# Altium PCB VALVE_MODULE_20221227.PcbDoc (part 2 of 4)
Units mm, origin at the board's own origin, x right, y up, seen from the top; angles counter-clockwise.
Board outline 260.15 x 142.01 mm, 2 copper layers (Top Layer, Bottom Layer); 455 components, 212 nets, 1302 pads, 385 vias.
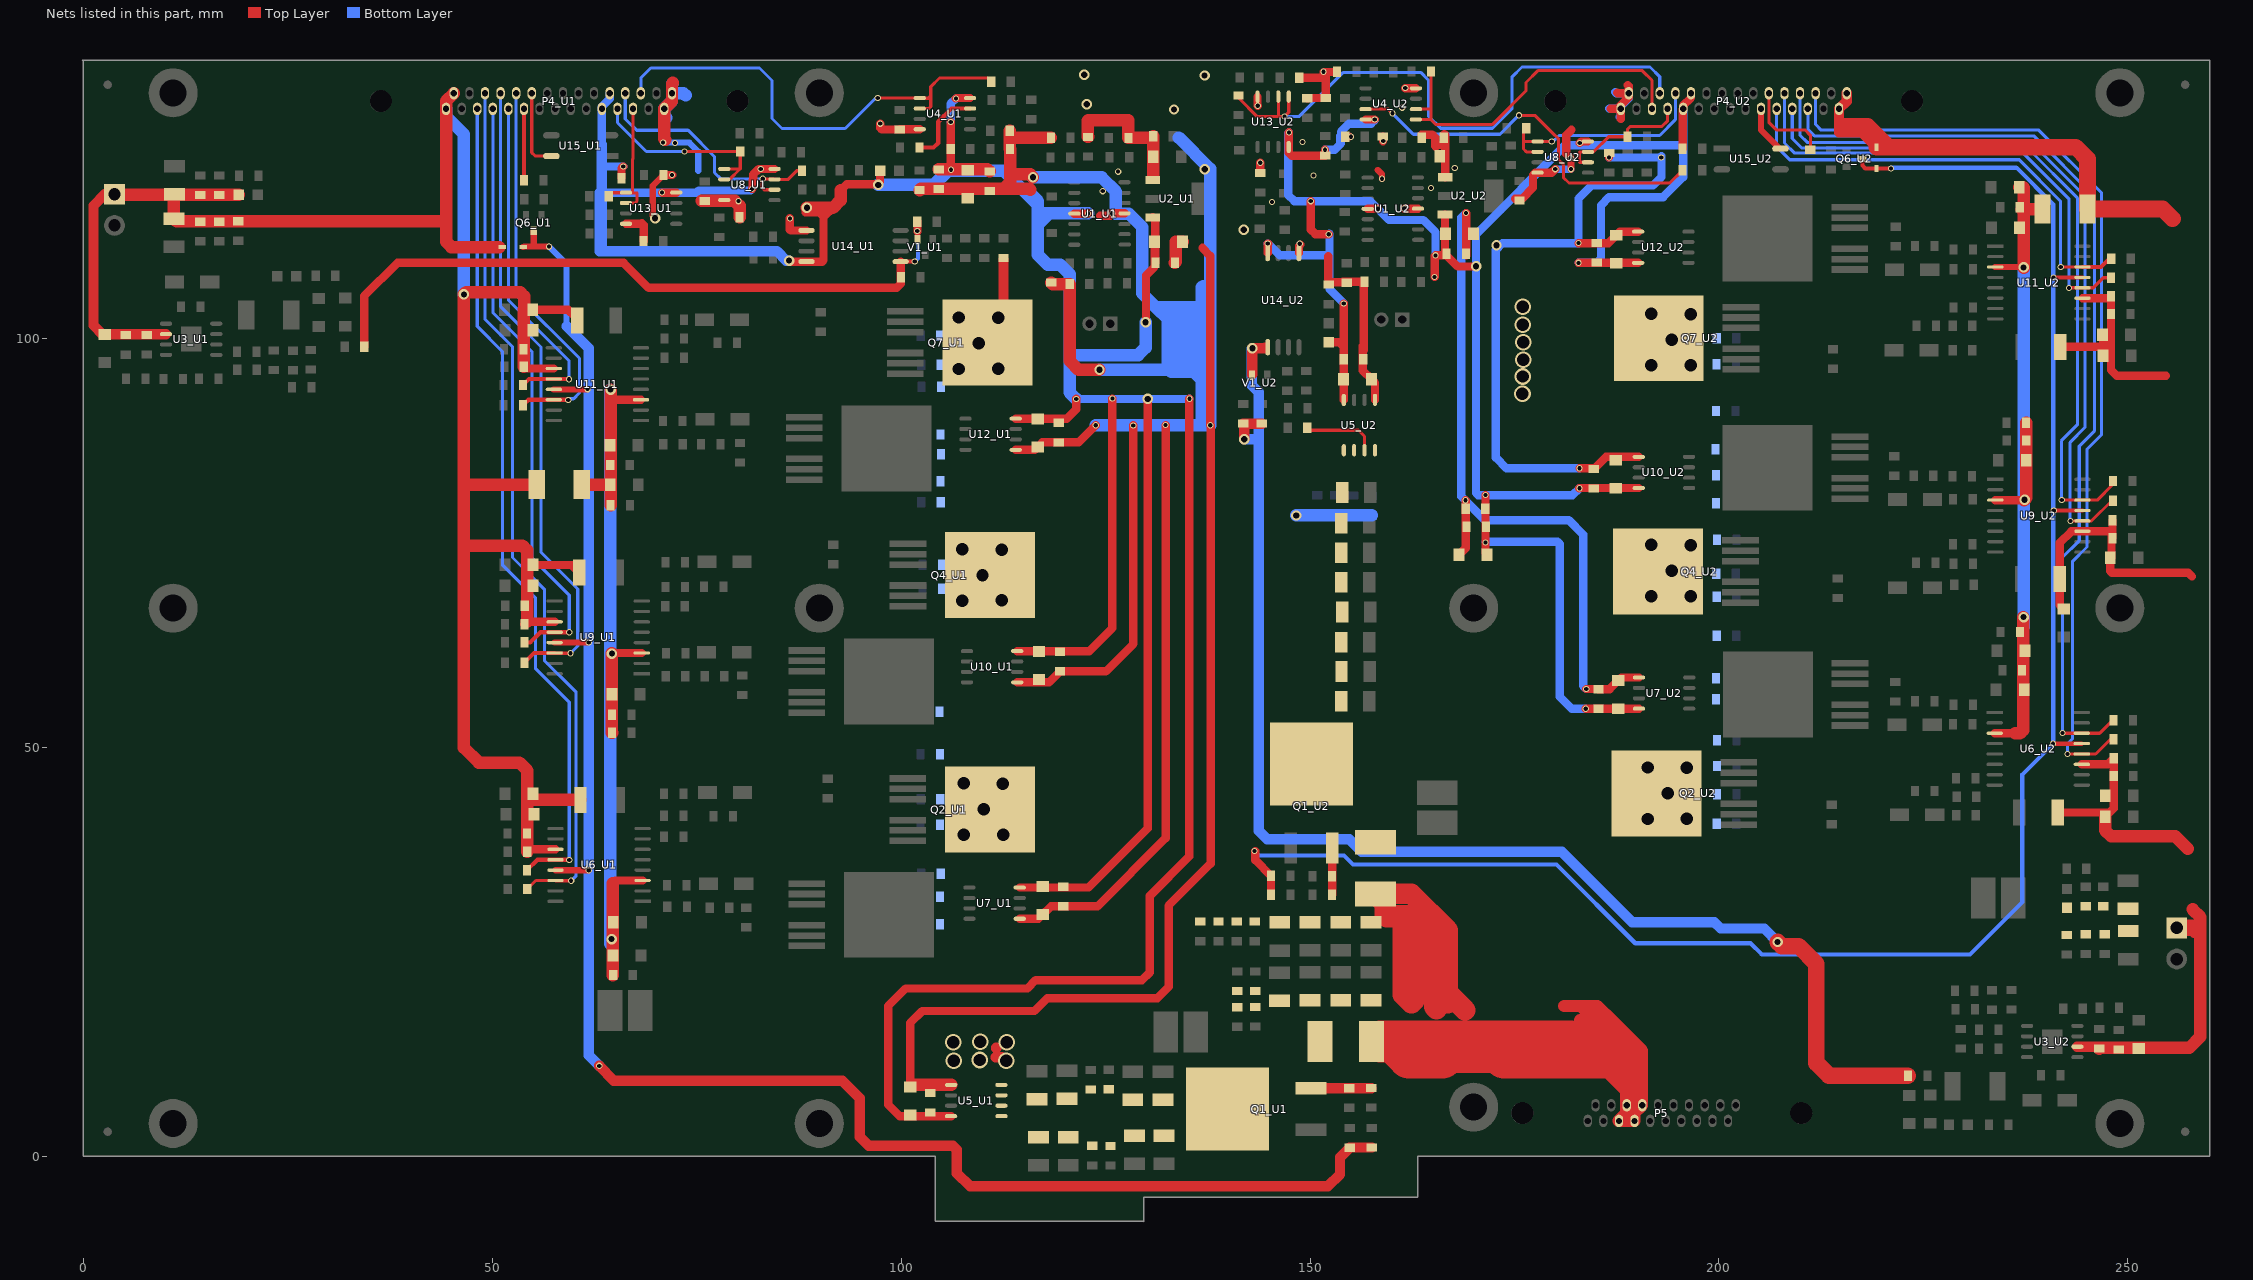
[diagram p2: the nets of this part, all layers, seen from the top]

## Part data
C1_U1 C1_U2 C2_U1 C2_U2: library part ELECTRO1, "Electrolytic Capacitor"
C3_U1 C3_U2 C4_U1 C4_U2 C12_U1 C12_U2 C14_U1 C14_U2 C31_U1 C31_U2 C32_U1 C32_U2 C33_U1 C33_U2 C42_U1 C42_U2 C43_U1 C43_U2 C44_U1 C44_U2 C45_U1 C45_U2 C46_U1 C46_U2 C48_U1 C48_U2 C50_U1 C50_U2 C51_U1 C51_U2 C52_U1 C52_U2 C53_U1 C53_U2 C61_U1 C61_U2 C64_U1 C64_U2 C67_U1 C67_U2 C68_U1 C68_U2 C73_U1 C73_U2 C74_U1 C74_U2 C75_U1 C75_U2 C76_U1 C76_U2 C77_U1 C77_U2 C78_U1 C78_U2 C79_U1 C79_U2 C80_U1 C80_U2 C81_U1 C81_U2 C82_U1 C82_U2 C83_U1 C83_U2 C84_U1 C84_U2 C85_U1 C85_U2 C86_U1 C86_U2 C87_U1 C87_U2 C88_U1 C88_U2 C89_U1 C89_U2 C90_U1 C90_U2 C91_U1 C91_U2 C92_U1 C92_U2 C93_U1 C93_U2 C95 C96 C97 C98 C99 C100 C101 C102 C103_U1 C103_U2 C107_U1 C107_U2 C109_U1 C109_U2 C111_U1 C111_U2 C113_U1 C113_U2: library part CAP, "Capacitor"
C5_U1 C5_U2 C6_U1 C6_U2 C24_U1 C24_U2 C41_U1 C41_U2 C49_U1 C49_U2 C55_U1 C55_U2 C56_U1 C56_U2 C57_U1 C57_U2 C66_U1 C66_U2 C72_U1 C72_U2 C104_U1 C104_U2 C106_U1 C106_U2 C108_U1 C108_U2 C110_U1 C110_U2 C112_U1 C112_U2: library part Cap2, "Capacitor"
C7_U1 C7_U2 C8_U1 C8_U2 C9_U1 C9_U2 C10_U1 C10_U2 C11_U1 C11_U2 C13_U1 C13_U2 C23_U1 C23_U2 C25_U1 C25_U2 C29_U1 C29_U2 C30_U1 C30_U2 C58_U1 C58_U2 C59_U1 C59_U2 C60_U1 C60_U2 C69_U1 C69_U2 C105_U1 C105_U2: library part "Cap Semi", "Capacitor (Semiconductor SIM Model)"
C15_U1 C15_U2 C16_U1 C16_U2 C17_U1 C17_U2 C18_U1 C18_U2 C19_U1 C19_U2 C20_U1 C20_U2 C34 C35 C36 C37 C38 C39 C40 C70_U1 C70_U2 C71_U1 C71_U2 C94: library part "Cap Pol1", "Polarized Capacitor (Radial)"
C21_U1 C21_U2 C22_U1 C22_U2 C65_U1 C65_U2: library part CAP1
C26_U1 C26_U2 C27_U1 C27_U2 C28_U1 C28_U2: library part Cap, "Capacitor"
C47_U1 C47_U2 C54_U1 C54_U2: "Capacitor (Semiconductor SIM Model)"
C62_U1 C62_U2 C63_U1 C63_U2: library part CAP
D1_U1 D1_U2: library part LED2
D2_U1 D2_U2 D5_U1 D5_U2 D9_U1 D9_U2 D10_U1 D10_U2 D14_U1 D14_U2 D15_U1 D15_U2 D18_U1 D18_U2: library part "DIODE SCHOTTKY", "Schottky Diode"
D3_U1 D3_U2 D19_U1 D19_U2: library part LED0, "Typical INFRARED GaAs LED"
D6_U1 D6_U2 D8_U1 D8_U2 D11_U1 D11_U2 D16_U1 D16_U2: library part Diode, "Default Diode"
F1 F2: library part "Fuse 2", "Fuse"
L1_U1 L1_U2 L2_U1 L2_U2: library part Inductor, "Inductor"
P1_U1 P1_U2 P2_U1 P2_U2: "Header, 2-Pin"
P4_U1 P4_U2: "Header, 15-Pin, Dual row"
P5: "Header, 10-Pin, Dual row"
Q1_U1 Q1_U2: library part MOSFET-P, "P-Channel MOSFET"
Q2_U1 Q2_U2 Q3_U1 Q3_U2 Q4_U1 Q4_U2 Q5_U1 Q5_U2 Q7_U1 Q7_U2 Q8_U1 Q8_U2: library part IPB160N04S3-H2
R1_U1 R1_U2 R2_U1 R2_U2 R3_U1 R3_U2 R4_U1 R4_U2 R5_U1 R5_U2 R6_U1 R6_U2 R7_U1 R7_U2 R8_U1 R8_U2 R9_U1 R9_U2 R10_U1 R10_U2 R11_U1 R11_U2 R12_U1 R12_U2 R13_U1 R13_U2 R14_U1 R14_U2 R15_U1 R15_U2 R18_U1 R18_U2 R21_U1 R21_U2 R23_U1 R23_U2 R26_U1 R26_U2 R27_U1 R27_U2 R28_U1 R28_U2 R29_U1 R29_U2 R30_U1 R30_U2 R32_U1 R32_U2 R34_U1 R34_U2 R35_U1 R35_U2 R36_U1 R36_U2 R37_U1 R37_U2 R38_U1 R38_U2 R39_U1 R39_U2 R41_U1 R41_U2 R42_U1 R42_U2 R43_U1 R43_U2 R44_U1 R44_U2 R47_U1 R47_U2 R49_U1 R49_U2 R52_U1 R52_U2 R53_U1 R53_U2 R54_U1 R54_U2 R56_U1 R56_U2 R57_U1 R57_U2 R59_U1 R59_U2 R60_U1 R60_U2 R61_U1 R61_U2 R62_U1 R62_U2 R64_U1 R64_U2 R66_U1 R66_U2 R67_U1 R67_U2 R68_U1 R68_U2 R69_U1 R69_U2 R70_U1 R70_U2 R72_U1 R72_U2 R73_U1 R73_U2 R74_U1 R74_U2 R75_U1 R75_U2 R76_U1 R76_U2 R77_U1 R77_U2 R78_U1 R78_U2 R79 R80: library part Res2, "Resistor"
R16_U1 R16_U2 R17_U1 R17_U2 R19_U1 R19_U2 R20_U1 R20_U2 R22_U1 R22_U2 R24_U1 R24_U2 R25_U1 R25_U2 R31_U1 R31_U2 R33_U1 R33_U2 R40_U1 R40_U2 R45_U1 R45_U2 R46_U1 R46_U2 R48_U1 R48_U2 R50_U1 R50_U2 R55_U1 R55_U2 R58_U1 R58_U2 R63_U1 R63_U2 R65_U1 R65_U2 R71_U1 R71_U2: library part RES
U1_U1 U1_U2: library part TL084D, "JFET-Input Operational Amplifier"
U2_U1 U2_U2: library part AS1117
U4_U1 U4_U2 U8_U1 U8_U2 U13_U1 U13_U2: library part LT1358, "Fast Settling Dual Operational Amplifier"
U5_U1 U5_U2 U7_U1 U7_U2 U10_U1 U10_U2 U12_U1 U12_U2: library part ACS711
U15_U1 U15_U2: library part TLP521-1

## Free pads (board coordinates)
  round 1.016 smd: ""(3,3) ""(3,131) ""(257,3) ""(257,131)
  round 1.016 smd far side: ""(3,3) ""(3,131) ""(257,3) ""(257,131)
  round 6 hole 3.3: ""(11,4) ""(11,67) ""(11,130) ""(90,4) ""(90,67) ""(90,130) ""(170,6) ""(170,67) ""(170,130) ""(249,4) ""(249,67) ""(249,130)

## Via types
v1: diameter 0.762, hole 0.508, Top Layer to Bottom Layer, 142 vias
v2: diameter 2.032, hole 1.524, Top Layer to Bottom Layer, 140 vias
v3: diameter 1.27, hole 0.762, Top Layer to Bottom Layer, 77 vias
v4: diameter 1.27, hole 0.711, Top Layer to Bottom Layer, 14 vias
v5: diameter 1.778, hole 1.27, Top Layer to Bottom Layer, 12 vias

## Nets (pads, with @x,y where several pads share a name; then routed paths per layer and width w, separated by ;. In a path a pad name is that pad's centre, name@x,y a point inside that pad or via, vN(x,y) a via of type N, cw(c..) or ccw(c..) an arc to the next point about the centre after c; other vN are vias at no path point)
1PWM1_U1: P4_U1.3 R31_U1.1 U6_U1.12 | length 102.2
  Top Layer w0.508: R31_U1.1@54.28,34.976 55.55,36.246 U6_U1.12@57.752,36.246 59.461,36.246 v1(59.436,36.22)
  Bottom Layer w0.381: P4_U1.3@48.184,128.047 48.184,101.447 51.257,98.374 51.257,72.314 55.296,68.275 55.296,59.639 59.436,55.499 v1(59.436,36.22)
1PWM1_U2: P4_U2.3 R31_U2.1 U6_U2.12 | length 118.9
  Top Layer w0.381: v1(242.621,49.174) U6_U2.12@244.355,49.174 246.05,49.174 247.828,50.952 R31_U2.1@248.234,50.952
  Bottom Layer w0.381: P4_U2.3@211.813,129.952 211.813,126.134 212.496,125.451 239.09,125.451 246.786,117.754 246.786,88.24 244.983,86.436 244.983,74.473 243.205,72.695 243.205,51.003 242.621,50.419 v1(242.621,49.174)
1PWM2_U1: P4_U1.18 R33_U1.1 U6_U1.14 | length 106.9
  Top Layer w0.381: R33_U1.1@54.305,32.664 55.347,33.706 U6_U1.14@57.752,33.706 57.778,33.68 v1(59.665,33.68)
  Bottom Layer w0.381: P4_U1.18@49.136,129.952 49.137,102.324 52.502,98.958 52.502,73.203 56.388,69.317 56.388,60.604 60.274,56.718 60.274,34.29 v1(59.665,33.68)
1PWM2_U2: P4_U2.18 R33_U2.1 U6_U2.14 | length 115.1
  Top Layer w0.381: v1(241.986,51.74) 242.011,51.714 U6_U2.14@244.355,51.714 246.532,51.714 248.133,53.315 R33_U2.1@248.234,53.315
  Bottom Layer w0.381: P4_U2.18@210.861,128.047 210.861,125.537 211.658,124.739 238.481,124.739 245.897,117.323 245.897,88.646 244.043,86.792 244.043,75.26 241.986,73.203 v1(241.986,51.74)
1PWM3_U1: P4_U1.4 R48_U1.1 U9_U1.12 | length 73.9
  Top Layer w0.508: R48_U1.1@53.95,62.814 54.661,62.814 55.905,64.059 U9_U1.12@57.651,64.059 v1(59.436,64.059)
  Bottom Layer w0.381: P4_U1.4@50.089,128.047 50.089,103.149 54.864,98.374 54.864,73.152 59.436,68.58 v1(59.436,64.059)
1PWM3_U2: P4_U2.4 R48_U2.1 U9_U2.12 | length 89.7
  Top Layer w0.381: v1(242.976,77.673) U9_U2.12@244.432,77.673 245.542,77.673 247.98,80.112 R48_U2.1@248.158,80.112
  Bottom Layer w0.381: P4_U2.4@209.908,129.952 209.908,124.813 210.769,123.952 238.15,123.952 244.754,117.348 244.754,89.103 242.926,87.274 242.926,77.724 v1(242.976,77.673)
1PWM4_U1: P4_U1.19 R50_U1.1 U9_U1.14 | length 78.9
  Top Layer w0.381: U9_U1.14@57.651,61.519 57.676,61.493 v1(59.588,61.493)
  Top Layer w0.508: R50_U1.1@53.95,60.35 55.118,61.519 U9_U1.14@57.651,61.519
  Bottom Layer w0.381: P4_U1.19@51.041,129.952 51.042,103.873 55.982,98.933 55.982,73.838 60.477,69.342 60.477,62.382 v1(59.588,61.493)
1PWM4_U2: P4_U2.19 R50_U2.1 U9_U2.14 | length 86.7
  Top Layer w0.381: v1(241.91,80.239) 244.406,80.239 U9_U2.14@244.432,80.213 246.253,80.213 248.158,82.118 R50_U2.1@248.158,82.55
  Bottom Layer w0.381: P4_U2.19@208.956,128.047 208.956,124.419 210.109,123.266 237.719,123.266 243.815,117.17 243.815,89.408 241.859,87.452 241.859,80.289 v1(241.91,80.239)
1PWM5_U1: P4_U1.5 R63_U1.1 U11_U1.12 | length 42.1
  Top Layer w0.508: R63_U1.1@53.772,94.285 54.508,95.021 U11_U1.12@57.549,95.021 59.385,95.021 v1(59.411,94.996)
  Bottom Layer w0.381: P4_U1.5@51.994,128.047 51.994,104.673 59.411,97.257 v1(59.411,94.996)
1PWM5_U2: P4_U2.5 R63_U2.1 U11_U2.12 | length 60.2
  Top Layer w0.381: v1(242.799,106.147) 242.824,106.172 U11_U2.12@244.432,106.172 245.77,106.172 246.99,107.391 R63_U2.1@247.929,107.391
  Bottom Layer w0.381: P4_U2.5@208.003,129.952 208.003,123.873 209.245,122.631 237.211,122.631 242.773,117.069 242.773,106.172 v1(242.799,106.147)
1PWM6_U1: P4_U1.20 R65_U1.1 U11_U1.14 | length 47.4
  Top Layer w0.508: R65_U1.1@53.772,91.821 54.432,92.481 U11_U1.14@57.549,92.481 59.284,92.481 v1(59.309,92.456)
  Bottom Layer w0.381: P4_U1.20@52.946,129.952 52.947,105.27 60.681,97.536 60.681,93.32 59.969,92.608 59.461,92.608 v1(59.309,92.456)
1PWM6_U2: P4_U2.20 R65_U2.1 U11_U2.14 | length 56.8
  Top Layer w0.381: v1(241.783,108.712) U11_U2.14@244.432,108.712
  Top Layer w0.508: U11_U2.14@244.432,108.712 246.71,108.712 247.701,109.703 R65_U2.1@247.955,109.703
  Bottom Layer w0.381: P4_U2.20@207.051,128.047 207.051,123.403 208.636,121.818 236.703,121.818 241.732,116.789 241.732,108.712 v1(241.783,108.712)
+5VA_U1: C1_U1.1 C4_U1.1 C55_U1.1 C56_U1.1 C57_U1.1 C58_U1.2 C59_U1.2 C60_U1.2 C62_U1.1 C63_U1.1 C65_U1.1 C104_U1.1 C105_U1.2 D19_U1.1 P4_U1.11 P4_U1.26 R13_U1.2 R45_U1.1 U1_U1.4 U2_U1.3 U4_U1.8 U5_U1.8 U7_U1.8 U8_U1.8 U10_U1.8 U12_U1.8 U13_U1.8 U14_U1.8 | length 473.5
  Top Layer w1.016: R45_U1.1@65.811,119.558 65.811,120.802 66.015,121.006 v1(66.04,121.006) ; v1(70.79,117.805) U13_U1.8@72.517,117.805 ; v1(81.788,118.237) 81.839,118.288 81.839,119.278 81.928,119.366 81.928,120.028 82.601,120.701 v1(82.855,120.701) U8_U1.8@84.531,120.701 ; v3(86.309,109.499) 86.309,109.347 86.335,109.372 U14_U1.8@88.443,109.372 90.373,109.372 90.526,109.525 90.526,114.808 ; v3@88.316,115.392 88.341,115.367 90.043,115.367 90.526,114.884 90.526,114.808 ; 91.669,115.951 90.526,114.808 ; 92.608,118.085 93.345,118.821 97.13,118.821 97.434,119.126 D19_U1.1@97.434,120.472 ; v1(106.07,126.441) R13_U1.2@106.07,123.139 106.07,120.65 106.07,120.625 v1(106.096,120.599) ; U5_U1.8@106.121,4.902 99.822,4.902 98.425,6.299 98.425,18.364 100.571,20.511 115.456,20.511 116.459,21.514 129.464,21.514 130.404,22.454 130.404,31.826 135.23,36.652 v1@135.23,92.608 ; v1(106.705,129.311) 106.756,129.362 U4_U1.8@108.433,129.362 ; U12_U1.8@114.021,90.17 120.269,90.17 121.412,91.313 v1(121.412,92.583) v1@121.412,92.634 ; U10_U1.8@114.198,61.747 123.012,61.747 125.832,64.567 v1(125.832,92.634) ; U7_U1.8@114.503,32.842 122.936,32.842 130.15,40.056 v3(130.15,92.583) ; U1_U1.4@121.183,115.24 122.834,115.24 v1(122.86,115.265) ; v3(129.896,101.956) 129.946,102.006 129.946,107.696 130.988,108.737 C1_U1.1@130.988,111.785 ; U2_U1.3@130.759,114.783 131.089,114.452 C4_U1.1@131.089,109.245
  Top Layer w1.524: v3(88.494,115.951) 91.669,115.951 92.608,116.891 92.608,118.085 ; C63_U1.1@104.623,120.65 106.07,120.65 110.566,120.65 C59_U1.2@110.82,120.396
  Bottom Layer w1.016: 63.17,117.805 63.424,117.805 v1(70.79,117.805) 75.006,117.805 75.26,118.059 81.61,118.059 v1(81.788,118.237) ; 63.424,121.158 63.424,121.328 63.747,121.006 v1(66.04,121.006) ; 63.424,123.672 P4_U1.11@63.424,128.047 63.424,128.321 64.376,129.273 P4_U1.26@64.376,129.952 ; v1(106.07,126.441) 106.07,128.676 v1(106.705,129.311) ; v1(121.412,92.583) v3@129.921,92.583 ; v3@129.946,92.608 v3@129.921,92.583 ; v1(135.255,92.608) 135.23,92.583 v3@129.921,92.583
  Bottom Layer w1.27: 63.17,117.805 63.17,110.617 ; 63.424,121.158 63.424,117.805 63.424,110.871 63.17,110.617 ; 63.424,121.328 63.424,123.672 ; v3(86.309,109.499) 85.954,109.499 84.836,110.617 63.17,110.617
  Bottom Layer w1.524: v3(97.206,118.745) 103.988,118.745 105.715,120.472 112.573,120.472 115.646,117.399 ; v1(121.412,92.583) 120.599,93.396 120.599,97.942 ; v1(122.86,115.265) 118.11,115.265 ; v3(129.896,101.956) 129.896,98.857 128.981,97.942 120.599,97.942 ; 115.646,117.399 116.738,116.307 ; 115.646,117.399 116.103,117.399 116.738,116.764 116.738,116.307 ; 116.738,113.894 116.738,115.494 ; 116.738,113.894 116.738,110.185 117.958,108.966 119.482,108.966 120.599,107.848 120.599,97.942 ; 116.738,113.894 118.11,115.265 ; 116.738,115.494 116.738,116.307 ; 116.738,115.494 116.967,115.265 118.11,115.265
+5VA_U2: C1_U2.1 C4_U2.1 C55_U2.1 C56_U2.1 C57_U2.1 C58_U2.2 C59_U2.2 C60_U2.2 C62_U2.1 C63_U2.1 C65_U2.1 C104_U2.1 C105_U2.2 D19_U2.1 P4_U2.11 P4_U2.26 R13_U2.2 R45_U2.1 U1_U2.4 U2_U2.3 U4_U2.8 U5_U2.8 U7_U2.8 U8_U2.8 U10_U2.8 U12_U2.8 U13_U2.8 U14_U2.8 | length 273.9
  Top Layer w1.016: U14_U2.8@144.831,110.414 v1(144.831,111.582) ; v1@144.831,111.557 v1@144.907,111.557 ; v1(147.422,125.171) 147.396,125.146 U13_U2.8@147.396,123.393 147.396,122.682 147.752,122.326 R13_U2.2@151.841,122.326 v1(151.841,123.038) ; v1(150.089,116.764) 150.089,113.284 150.647,112.725 v1(152.298,112.725) ; D19_U2.1@152.298,99.517 153.543,99.517 154.127,98.933 ; U5_U2.8@154.127,92.456 C59_U2.2@154.127,97.434 154.127,98.933 ; v1(154.127,104.242) 154.127,98.933 ; U4_U2.8@156.794,126.746 v1(157.912,126.746) ; U1_U2.4@157.048,115.824 v1(158.293,115.824) ; v1(165.227,107.493) 165.252,107.518 165.252,110.058 v1(165.329,110.134) C4_U2.1@166.675,110.134 ; U2_U2.3@166.497,115.113 166.497,110.312 C4_U2.1@166.675,110.134 ; v3@170.015,108.763 168.046,108.763 C4_U2.1@166.675,110.134 ; v1(171.45,80.848) v1(171.45,75.032) 171.45,73.736 C55_U2.1@171.653,73.533 ; v1(182.829,109.22) U12_U2.8@190.119,109.22 ; v1(182.931,81.661) 182.956,81.686 U10_U2.8@190.195,81.686 ; v1(182.982,123.876) 183.159,124.054 U8_U2.8@183.972,124.054 ; v1(183.718,54.712) C105_U2.2@185.268,54.712 C104_U2.1@187.681,54.712 U7_U2.8@190.221,54.712 ; R45_U2.1@195.555,123.165 195.555,127.981 P4_U2.26@195.621,128.047 195.621,128.438 196.573,129.39 P4_U2.11@196.573,129.952
  Bottom Layer w1.016: v1@144.844,111.595 146.304,110.134 152.375,110.134 ; v1(147.422,125.171) 147.32,125.07 147.32,117.526 148.082,116.764 v1(150.089,116.764) 157.353,116.764 v1(158.293,115.824) 159.664,114.452 163.855,114.452 165.329,112.979 v1(165.329,110.134) ; v1(151.841,123.038) 153.01,123.038 153.67,123.698 ; v1@152.349,112.776 152.375,112.751 152.375,110.134 ; 153.67,124.739 153.67,123.698 ; v1(154.127,104.242) 152.375,105.994 152.375,110.134 ; v1@157.912,126.682 157.467,126.238 154.762,126.238 153.784,125.26 153.784,123.812 153.67,123.698 ; v1@171.45,75.133 180.264,75.133 180.543,74.854 180.543,56.159 181.991,54.712 v1(183.718,54.712) ; v1(182.829,109.22) 185.064,109.22 185.572,109.728 185.572,116.256 186.563,117.246 193.167,117.246 195.621,119.7 195.621,123.901 ; v1(182.931,81.661) 182.093,80.823 170.536,80.823 170.282,81.077 170.282,112.7 181.178,123.596 195.316,123.596 195.621,123.901 ; P4_U2.26@195.621,128.047 195.621,123.901
  other v3: 170.307,108.814
AGND_U1: C1_U1.2 C2_U1.2 C3_U1.2 C4_U1.2 C12_U1.2 C14_U1.2 C33_U1.2 C46_U1.2 C53_U1.2 C55_U1.2 C56_U1.2 C57_U1.2 C58_U1.1 C59_U1.1 C60_U1.1 C62_U1.2 C63_U1.2 C64_U1.2 C65_U1.2 C104_U1.2 C105_U1.1 P4_U1.15 P4_U1.30 R9_U1.1 R10_U1.1 R11_U1.2 R12_U1.2 R14_U1.1 R71_U1.1 R72_U1.2 U1_U1.11 U2_U1.1 U4_U1.4 U5_U1.5 U7_U1.5 U8_U1.4 U10_U1.5 U12_U1.5 U13_U1.4 U14_U1.5 | length 527.7
  Top Layer w0.762: v3(69.926,114.681) 69.647,114.96 69.647,118.643 C64_U1.2@70.968,119.964
  Top Layer w1.016: U13_U1.4@66.37,113.995 68.275,113.995 68.326,114.046 68.529,113.843 R72_U1.2@68.529,111.887 ; C64_U1.2@70.968,119.964 v1(72.009,119.964) ; v1(86.411,114.656) 86.411,113.284 86.512,113.182 U14_U1.5@88.443,113.182 ; v1(97.46,126.238) 97.46,125.705 97.638,125.527 C33_U1.2@99.822,125.527 99.847,125.552 U4_U1.4@102.286,125.552 ; C104_U1.2@101.117,8.458 101.117,16.281 102.591,17.755 116.307,17.755 117.881,19.329 131.343,19.329 132.715,20.701 132.715,30.632 137.846,35.763 v1@137.846,89.357 ; U12_U1.5@114.021,86.36 116.357,86.36 C55_U1.2@116.713,86.716 117.272,87.274 C62_U1.2@119.278,87.274 121.717,87.274 v1(123.8,89.357) ; U10_U1.5@114.198,57.937 118.085,57.937 C58_U1.1@119.431,59.284 125.044,59.284 128.397,62.636 v1@128.397,89.357 ; U7_U1.5@114.503,29.032 116.815,29.032 C65_U1.2@117.323,29.54 118.339,30.556 C60_U1.1@119.837,30.556 124.028,30.556 132.359,38.887 v1@132.359,89.357 ; 124.333,114.986 125.552,114.986 v1(125.806,115.24) ; v1@125.654,115.24 125.679,115.265 U1_U1.11@127.33,115.265 ; 136.855,111.049 136.855,111.023 137.795,110.084 v1(137.795,89.357)
  Top Layer w1.524: 71.196,124.257 71.044,124.409 P4_U1.15@71.044,128.047 71.996,128.999 P4_U1.30@71.996,129.952 71.996,131.127 72.085,131.216 ; C46_U1.2@75.641,116.789 79.654,116.789 80.264,116.18 C53_U1.2@80.264,114.783 ; C104_U1.2@101.219,8.712 U5_U1.5@106.121,8.712 ; R71_U1.1@102.26,118.11 102.413,118.262 C63_U1.2@104.623,118.262 112.547,118.262 ; C14_U1.2@113.284,125.374 113.284,124.409 ; 115.799,118.135 115.672,118.262 112.547,118.262 ; v3(116.129,119.685) 115.773,120.04 113.335,120.04 ; R9_U1.1@118.313,124.511 113.386,124.511 113.284,124.409 ; R10_U1.1@118.364,106.807 118.542,106.629 R11_U1.2@120.625,106.629 120.625,97.231 121.717,96.139 v3(124.257,96.139) ; C12_U1.2@122.86,124.612 122.809,124.663 122.809,126.594 122.885,126.67 127.762,126.67 127.787,126.644 R12_U1.2@127.787,124.485 130.632,124.485 C3_U1.2@130.835,124.689 C2_U1.2@130.835,122.199 U2_U1.1@130.835,119.71 ; C4_U1.2@133.477,109.245 133.604,109.372 133.604,111.811 133.629,111.785 C1_U1.2@134.417,111.785 ; 112.547,118.262 113.335,119.05 113.335,120.04 ; 113.284,124.409 113.284,123.19 R14_U1.1@113.335,123.139 113.335,120.04
  Bottom Layer w0.762: v1(70.917,123.927) 74.105,123.927 75.209,122.822 75.209,120.472
  Bottom Layer w1.016: v1(125.806,115.24) 126.263,115.24
  Bottom Layer w1.524: 71.323,126.949 71.044,127.228 P4_U1.15@71.044,128.047 71.996,128.999 P4_U1.30@71.996,129.952 ; 72.06,131.166 71.996,131.102 P4_U1.30@71.996,129.952 ; 73.66,129.692 73.4,129.952 P4_U1.30@71.996,129.952 ; v3@116.129,119.659 124.536,119.659 126.263,117.932 126.263,115.24 127.838,115.24 129.489,113.589 129.489,105.486 131.191,103.784 ; v1(123.8,89.357) 136.627,89.357 ; v3(124.257,96.139) 132.817,96.139 ; 133.96,124.536 137.795,120.701 v1(137.795,89.357) 136.627,89.357 ; 136.931,106.375 136.779,106.223 136.779,94.869 ; 131.191,103.784 132.613,102.362 132.613,96.342 132.817,96.139 ; 131.191,103.784 133.172,103.784 ; 132.817,96.139 133.045,95.91 ; 133.045,95.91 134.442,95.91 ; 133.045,95.91 133.045,103.657 133.172,103.784 ; 133.172,103.784 134.468,103.784 ; 134.442,95.91 134.442,103.759 134.468,103.784 ; 134.442,95.91 135.738,95.91 ; 134.468,103.784 135.788,103.784 135.738,103.734 135.738,95.91 ; 135.738,95.91 136.779,94.869 ; 136.627,89.357 136.779,89.51 136.779,94.869
  other v1: 128.397,89.332 132.334,89.383 80.112,116.764 124.663,117.983 126.543,120.371 72.365,123.876
  other v3: 137.135,120.65 133.375,127.965 122.707,128.6 137.109,132.131 122.403,132.207
AGND_U2: C1_U2.2 C2_U2.2 C3_U2.2 C4_U2.2 C12_U2.2 C14_U2.2 C33_U2.2 C46_U2.2 C53_U2.2 C55_U2.2 C56_U2.2 C57_U2.2 C58_U2.1 C59_U2.1 C60_U2.1 C62_U2.2 C63_U2.2 C64_U2.2 C65_U2.2 C104_U2.2 C105_U2.1 P4_U2.15 P4_U2.30 R9_U2.1 R10_U2.1 R11_U2.2 R12_U2.2 R14_U2.1 R71_U2.1 R72_U2.2 U1_U2.11 U2_U2.1 U4_U2.4 U5_U2.5 U7_U2.5 U8_U2.4 U10_U2.5 U12_U2.5 U13_U2.4 U14_U2.5 | length 258.7
  Top Layer w0.762: 158.293,120.574 158.801,120.066 v1(158.801,119.507)
  Top Layer w0.889: v1(181.915,120.675) v1@181.915,121.945
  Top Layer w1.016: U13_U2.4@143.586,129.54 143.586,128.448 v1(143.612,128.422) ; v1(143.909,121.456) 143.916,121.448 R72_U2.2@143.916,120.218 ; U14_U2.5@148.641,110.414 148.641,111.277 v1@148.819,111.455 ; C64_U2.2@148.692,131.851 151.587,131.851 151.917,132.182 ; C14_U2.2@149.682,129.337 149.708,129.362 R14_U2.1@151.917,129.362 151.917,132.182 ; v1@151.689,132.563 152.298,132.563 ; 152.222,110.007 152.222,107.264 152.654,106.832 153.924,106.832 154,106.909 156.159,106.909 156.566,106.502 156.566,98.527 156.439,98.4 ; C33_U2.2@153.289,132.563 152.298,132.563 ; R9_U2.1@154.28,124.663 v1@154.813,124.663 ; 156.413,99.06 156.439,99.035 156.439,98.4 ; U5_U2.5@157.937,92.456 157.937,94.564 C57_U2.2@157.505,94.996 156.439,96.063 156.439,98.4 ; v1@158.928,124.104 C12_U2.2@158.928,124.663 ; v1(161.519,115.849) U1_U2.11@163.195,115.849 ; v1(161.646,130.581) 161.671,130.556 U4_U2.4@162.941,130.556 ; R12_U2.2@163.627,124.892 164.948,124.892 165.303,124.536 165.303,123.495 165.379,123.419 165.583,123.622 166.421,123.622 ; C3_U2.2@166.421,124.968 166.522,124.866 U2_U2.1@166.522,119.685 ; C55_U2.2@168.224,73.533 169.037,74.346 C62_U2.2@169.037,79.172 169.037,80.162 v1(169.012,80.188) ; v1(169.062,115.316) 169.088,115.291 C4_U2.2@169.088,110.109 ; C46_U2.2@175.057,117.043 175.895,117.043 177.267,118.415 177.267,119.964 177.546,120.244 U8_U2.4@177.825,120.244 179.553,120.244 v1(179.984,120.675) ; v1@181.915,121.945 181.331,122.53 181.331,124.841 181.966,125.476 ; v1(182.829,111.633) C58_U2.1@185.039,111.633 186.487,111.633 C56_U2.2@187.452,112.598 187.884,113.03 U12_U2.5@190.119,113.03 ; v1(182.956,84.099) 184.633,84.099 C63_U2.2@184.709,84.023 186.182,85.496 U10_U2.5@190.195,85.496 ; v1(183.769,57.125) C105_U2.1@185.242,57.125 ; C105_U2.1@185.268,57.099 186.639,57.099 C104_U2.2@187.681,58.141 188.062,58.522 U7_U2.5@190.221,58.522 ; v1(186.563,122.098) C53_U2.2@186.563,122.657 ; 186.741,128.041 187.995,128.041 P4_U2.30@188.001,128.047 ; 187.579,129.997 187.624,129.952 P4_U2.15@188.953,129.952 ; 188.011,126.797 188.001,126.807 P4_U2.30@188.001,128.047 ; 188.826,130.958 188.953,130.831 P4_U2.15@188.953,129.952 ; 151.917,132.182 152.298,132.563 ; P4_U2.30@188.001,128.047 188.001,128.514 188.953,129.466 P4_U2.15@188.953,129.952
  Bottom Layer w0.889: v1(179.984,120.675) v1(181.915,120.675)
  Bottom Layer w1.016: v1(169.062,115.316) 168.504,114.757 168.504,80.645 171.399,77.749 181.635,77.749 183.388,75.997 183.388,57.506 v1(183.769,57.125) ; v1(182.956,84.099) 174.015,84.099 172.72,85.395 172.72,110.82 173.533,111.633 v1(182.829,111.633) 182.829,117.094 184.404,118.669 191.922,118.669 192.964,119.71 192.964,122.276 192.786,122.098 v1(186.563,122.098) ; 186.588,128.092 186.634,128.047 P4_U2.30@188.001,128.047 ; 187.3,130.099 187.446,129.952 P4_U2.15@188.953,129.952 188.953,129.339 188.001,128.387 P4_U2.30@188.001,128.047 ; 187.874,127.041 188.001,127.168 P4_U2.30@188.001,128.047
  other v1: 148.742,111.557 145.364,116.662 164.795,118.364 150.419,119.888 167.691,120.802 181.864,122.047 192.938,122.098 149.073,124.003 158.953,124.104 155.016,124.638 161.265,128.194 151.663,132.588
  other v3: 172.796,111.379 141.91,113.259
EN_WRK_U1: P4_U1.6 R55_U1.2 | length 9
  Top Layer w0.508: R55_U1.2@53.899,119.024 P4_U1.6@53.899,128.047
EN_WRK_U2: P4_U2.6 R55_U2.2 | length 11.1
  Top Layer w0.381: P4_U2.6@206.098,129.952 206.098,126.39 207.013,125.476 210.515,125.476 211.176,124.816 211.176,123.063 R55_U2.2@211.15,123.038
ENWRK_U1: D8_U1.1 Q6_U1.3 R18_U1.2 R38_U1.2 U6_U1.13 U9_U1.13 U11_U1.13 | length 228.3
  Top Layer w0.762: D8_U1.1@53.823,111.151 53.899,111.227 55.093,111.227 ; Q6_U1.3@55.093,113.132 55.093,111.227 ; v1(56.972,111.201) 56.947,111.227 55.093,111.227 ; U11_U1.13@57.549,93.751 61.646,93.751 v1(61.671,93.777) ; U9_U1.13@57.651,62.789 v1@61.671,62.789 ; U6_U1.13@57.752,34.976 57.778,34.95 v1(61.824,34.95)
  Top Layer w1.27: v1(63.094,11.049) 64.897,9.246 92.837,9.246 94.971,7.112 94.971,2.388 96.063,1.295 106.324,1.295 106.832,0.787 106.832,-2.083 108.433,-3.683 152.171,-3.683 153.67,-2.184 153.67,-0.127 R38_U1.2@154.838,1.041 154.864,1.067 R18_U1.2@157.556,1.067
  Bottom Layer w0.762: v1(56.972,111.201) 59.106,109.068 59.106,101.473 59.157,101.422
  Bottom Layer w1.27: 59.106,101.473 61.824,98.755 v1(61.824,62.789) v1(61.824,34.95) 61.824,12.319 v1(63.094,11.049)
ENWRK_U2: D8_U2.1 Q6_U2.3 R18_U2.2 R38_U2.2 U6_U2.13 U9_U2.13 U11_U2.13 | length 231.5
  Top Layer w0.508: Q6_U2.3@217.526,121.92 217.526,121.107 217.881,120.752 D8_U2.1@219.278,120.752 v1(221.031,120.752) ; v1(240.843,50.419) 244.33,50.419 U6_U2.13@244.355,50.444 ; v1(240.894,107.442) U11_U2.13@244.432,107.442 ; v1(240.919,78.943) U9_U2.13@244.432,78.943
  Top Layer w1.016: v1@143.307,37.313 143.307,36.195 R18_U2.2@145.237,34.265 R38_U2.2@145.237,31.953
  Bottom Layer w0.508: v1(143.205,37.313) 143.739,36.779 154.153,36.779 155.27,35.662 180.137,35.662 189.763,26.035 203.86,26.035 205.232,24.663 230.683,24.663 237.084,31.064 237.084,46.66 v1(240.843,50.419) 240.868,50.444 240.868,116.332 236.347,120.853 v1@221.031,120.853
FAULT_U1: P4_U1.21 U15_U1.6 | length 9.8
  Top Layer w0.381: P4_U1.21@54.851,129.952 54.852,122.694 55.27,122.276 U15_U1.6@57.226,122.276
FAULT_U2: P4_U2.21 U15_U2.6 | length 5.8
  Top Layer w0.762: P4_U2.21@205.146,128.047 205.146,125.451 U15_U2.6@207.407,123.19
HVCC_IN: C34.1 C35.1 C36.1 C37.1 C38.1 C39.1 C40.1 C94.1 C95.1 C96.1 C97.1 C98.1 C99.1 C100.1 C101.1 C102.1 F1.1 F2.1 P5.7 P5.8 P5.17 P5.18 | length 203.4
  Top Layer w1.524: 181.077,18.364 185.115,18.364 187.02,16.459 ; 181.762,14.021 182.601,14.021 184.607,12.014 188.665,7.956 ; 183.007,16.612 183.159,16.459 185.039,16.459 ; 183.363,18.136 185.039,16.459 ; 188.798,13.818 189.617,12.998 189.617,5.271 ; 185.039,16.459 187.02,16.459 ; 187.02,16.459 190.57,12.909 190.57,6.223 189.617,5.271 ; 188.665,7.956 188.665,9.404 ; 188.665,7.956 188.665,6.223 188.665,5.271 187.712,4.318 189.617,4.318 189.617,5.271 ; 188.665,9.404 186.182,11.887 186.182,12.014 186.182,14.021 188.189,12.014 188.665,11.538 188.665,10.541 188.665,9.404
  Top Layer w2.54: 165.456,18.009 165.176,18.288 165.176,28.6 164.363,29.413 160.731,29.413 ; 166.421,20.371 168.935,17.856 ; 166.827,18.694 166.827,27.635 162.382,32.08 F2.1@157.988,32.08 159.182,30.886 159.182,29.413 ; 159.182,29.413 160.731,29.413 ; 159.182,29.413 159.385,29.21 160.934,29.21 ; 160.731,29.413 160.934,29.21 ; 160.934,29.21 162.712,29.21 162.712,18.999 162.408,18.694 161.366,19.736 161.366,28.778 160.934,29.21
  Top Layer w3.81: 166.141,12.065 173.736,12.065 180.645,12.065 182.601,14.021
  Top Layer w5.08: F1.1@158.648,14.021 160.147,14.021 ; 162.1,12.065 162.103,12.065 ; 166.141,12.065 162.103,12.065 ; 181.762,14.021 171.78,14.021 ; 182.601,14.021 186.182,14.021 ; 187.412,11.794 188.665,10.541 ; 188.57,12.014 188.189,12.014 186.182,12.014 184.607,12.014 173.787,12.014 173.736,12.065 171.78,14.021 ; 160.147,14.021 171.78,14.021 ; 160.147,14.021 162.103,12.065
HVCC_IN_U1: F1.2 Q1_U1.3 R15_U1.1 R34_U1.1 | length 7.4
  Top Layer w1.27: Q1_U1.3@150.139,8.306 150.165,8.331 R15_U1.1@157.48,8.331
HVCC_IN_U2: F2.2 Q1_U2.3 R15_U2.1 R34_U2.1 | length 5.7
  Top Layer w1.016: R15_U2.1@152.705,31.953 Q1_U2.3@152.705,37.694
HVCC_U1: C78_U1.1 C79_U1.1 C80_U1.1 C81_U1.1 C82_U1.1 C83_U1.1 C84_U1.1 C85_U1.1 C86_U1.1 C87_U1.1 C88_U1.1 C89_U1.1 C90_U1.1 C91_U1.1 C92_U1.1 C93_U1.1 Q2_U1.4 Q4_U1.4 Q7_U1.4 R74_U1.2 U5_U1.3 U5_U1.4 | length 11.7
  Top Layer w1.27: Q7_U1.4@110.566,99.466 112.522,101.422 R74_U1.2@112.522,109.576 ; 111.582,12.116 v2@112.293,12.116 ; 111.633,13.183 111.633,13.259
  other v2: 106.451,11.684 112.852,11.684 109.626,11.76 106.401,13.919 112.928,13.919 109.703,13.97 107.645,39.294 112.471,39.319 110.109,42.418 112.446,45.542 107.645,45.593 107.493,67.92 112.319,67.945 109.957,71.044 112.293,74.168 107.493,74.219 107.061,96.241 111.887,96.266 109.525,99.365 111.862,102.489 107.061,102.54
HVCC_U2: C78_U2.1 C79_U2.1 C80_U2.1 C81_U2.1 C82_U2.1 C83_U2.1 C84_U2.1 C85_U2.1 C86_U2.1 C87_U2.1 C88_U2.1 C89_U2.1 C90_U2.1 C91_U2.1 C92_U2.1 C93_U2.1 Q2_U2.4 Q4_U2.4 Q7_U2.4 R74_U2.2 U5_U2.3 U5_U2.4 | length 9.3
  Top Layer w0.381: R74_U2.2@149.352,88.748 155.931,88.748 156.667,88.011 U5_U2.3@156.667,86.309
  other v2: 191.262,41.224 196.037,41.275 193.726,44.348 196.063,47.473 191.262,47.523 191.745,68.453 196.571,68.478 194.208,71.577 196.545,74.701 191.745,74.752 175.971,93.218 175.997,95.326 191.745,96.698 196.571,96.723 176.047,97.384 176.073,99.492 194.208,99.822 175.997,101.651 196.545,102.946 191.745,102.997 175.997,103.861
HVCCIN_U1: C15_U1.1 C16_U1.1 C17_U1.1 C18_U1.1 C19_U1.1 C20_U1.1 C70_U1.1 C71_U1.1 C74_U1.1 C75_U1.1 C76_U1.1 C77_U1.1 Q1_U1.2 U5_U1.1 U5_U1.2
HVCCIN_U2: C15_U2.1 C16_U2.1 C17_U2.1 C18_U2.1 C19_U2.1 C20_U2.1 C70_U2.1 C71_U2.1 C74_U2.1 C75_U2.1 C76_U2.1 C77_U2.1 Q1_U2.2 U5_U2.1 U5_U2.2 | length 9.2
  Bottom Layer w1.524: v3(148.311,78.334) C75_U2.1@157.531,78.334
II_1_AC1_U1: C45_U1.2 P4_U1.12 U8_U1.1 U8_U1.2 | length 25.4
  Top Layer w0.381: v1(73.533,122.834) C45_U1.2@80.34,122.834 80.34,120.726 ; U8_U1.2@78.384,119.431 79.045,119.431 80.315,120.701 U8_U1.1@78.384,120.701
  Bottom Layer w0.381: P4_U1.12@65.329,128.047 65.329,126.365 68.859,122.834 69.799,122.834 v1@73.635,122.834 ; 72.847,122.834 v1(73.533,122.834)
II_1_AC1_U2: C45_U2.2 P4_U2.12 U8_U2.1 U8_U2.2 | length 27.4
  Top Layer w0.381: C45_U2.2@176.098,125.73 176.098,124.054 ; U8_U2.2@177.825,122.784 176.454,122.784 176.098,123.139 176.098,124.054 ; v1(179.553,124.054) U8_U2.1@177.825,124.054 176.098,124.054
  Bottom Layer w0.381: v1(179.553,124.054) 179.629,123.977 180.442,124.79 192.735,124.79 194.668,126.723 P4_U2.12@194.668,129.952
II_1_AC2_U1: C48_U1.2 P4_U1.27 U8_U1.6 U8_U1.7 | length 32.1
  Top Layer w0.381: U8_U1.6@84.531,118.161 83.236,118.161 83.007,118.389 83.033,118.415 83.033,119.355 83.16,119.482 84.48,119.482 U8_U1.7@84.531,119.431 86.208,119.431 87.249,120.472 C48_U1.2@87.884,120.472
  Bottom Layer w0.381: P4_U1.27@66.281,129.952 66.282,126.809 67.666,125.425 73.965,125.425 77.191,122.199 77.191,120.244 77.953,119.482 83.083,119.482 v1(83.083,119.507)
II_1_AC2_U2: C48_U2.2 P4_U2.27 U8_U2.6 U8_U2.7 | length 16.7
  Top Layer w0.381: U8_U2.6@183.972,121.514 182.931,121.514 182.931,122.784 U8_U2.7@183.972,122.784 184.658,122.784 186.512,124.638 C48_U2.2@188.824,124.638 188.824,125.578 189.128,125.882 193.015,125.882 193.716,126.584 P4_U2.27@193.716,128.047
II_1_AC3_U1: C61_U1.2 P4_U1.13 U13_U1.1 U13_U1.2 | length 17.3
  Top Layer w0.381: U13_U1.2@66.37,116.535 67.488,116.535 67.716,116.764 67.716,117.754 67.691,117.78 64.694,117.78 64.719,117.805 U13_U1.1@66.37,117.805 ; 67.158,117.881 67.158,121.818 67.234,121.895 P4_U1.13@67.234,128.047
II_1_AC3_U2: C61_U2.2 P4_U2.13 U13_U2.1 U13_U2.2 | length 77.9
  Top Layer w0.381: C61_U2.2@141.249,129.692 141.249,129.388 143.535,127.102 146.126,127.102 ; U13_U2.2@146.126,129.54 146.126,127.102 ; U13_U2.1@147.396,129.54 147.396,127.635 v1(146.888,127.127) 146.863,127.102 146.126,127.102
  Bottom Layer w0.381: v1(146.888,127.127) 148.692,127.127 154.076,132.512 163.525,132.512 164.465,131.572 164.465,127.178 165.964,125.679 ; 170.459,125.679 165.964,125.679 ; P4_U2.13@192.763,129.952 192.763,131.976 191.567,133.172 175.92,133.172 174.676,131.928 174.676,128.041 172.314,125.679 165.964,125.679
II_1_DC1_U1: C31_U1.2 P4_U1.28 U4_U1.1 U4_U1.2 | length 57.2
  Top Layer w0.381: v1(97.155,129.362) U4_U1.1@102.286,129.362 102.311,129.337 103.327,129.337 103.632,129.642 ; U4_U1.2@102.286,128.092 103.403,128.092 103.632,128.321 103.632,129.642 ; C31_U1.2@111.023,131.343 110.541,131.826 104.699,131.826 103.632,130.759 103.632,129.642
  Bottom Layer w0.381: P4_U1.28@68.186,129.952 68.186,131.813 69.418,133.045 82.702,133.045 84.226,131.521 84.226,126.873 85.446,125.654 93.167,125.654 96.876,129.362 v1(97.155,129.362)
II_1_DC1_U2: C31_U2.2 P4_U2.28 U4_U2.1 U4_U2.2 | length 44.4
  Top Layer w0.381: U4_U2.1@162.941,126.746 164.77,126.746 165.405,126.111 172.263,126.111 176.403,130.251 176.403,131.267 177.851,132.715 190.627,132.715 191.811,131.531 P4_U2.28@191.811,128.047 ; U4_U2.2@162.941,128.016 164.719,128.016 164.795,128.092 ; 164.719,126.746 164.795,126.822 C31_U2.2@164.795,132.613 ; P4_U2.28@191.719,127.955 P4_U2.28@191.811,128.047
II_FLT_U1: R46_U1.1 U4_U1.7 | length 9.8
  Top Layer w0.508: R46_U1.1@102.26,123.114 102.463,123.317 103.987,123.317 104.546,123.876 104.546,126.467 106.172,128.092 U4_U1.7@108.433,128.092
II_FLT_U2: R46_U2.1 U4_U2.7 | length 47.5
  Top Layer w0.381: U4_U2.7@156.794,128.016 159.563,128.016 v1(160.071,127.508) ; v1(175.539,127.254) 177.47,127.254 179.845,124.879 179.895,124.879 180.378,124.396 180.378,124.346 180.378,121.856 180.975,121.26 180.975,119.659 181.661,118.974 193.98,118.974 R46_U2.1@195.555,120.548
  Bottom Layer w0.381: v1(160.071,127.508) 162.636,124.943 173.228,124.943 v1(175.539,127.254) v1@175.539,127.279
ISO_+5V_U1: C29_U1.2 C30_U1.2 R40_U1.2 U14_U1.1 V1_U1.2 | length 85.7
  Top Layer w0.508: U14_U1.1@99.949,109.372 v1(101.676,109.372) ; V1_U1.2@102.006,112.116 102.006,113.03 v1@102.095,113.119
  Top Layer w1.016: R40_U1.2@34.366,98.958 34.366,105.156 38.43,109.22 66.091,109.22 69.139,106.172 99.466,106.172 99.949,106.655 U14_U1.1@99.949,109.372 ; v1@102.006,113.03 C30_U1.2@102.006,114.3
  Bottom Layer w0.508: v1(101.676,109.372) 102.057,109.753 v1@102.057,113.233
  other v1: 101.981,113.106
ISO_+5V_U2: C29_U2.2 C30_U2.2 R40_U2.2 U14_U2.1 V1_U2.2 | length 169.1
  Top Layer w1.27: v3(141.961,87.655) 141.961,89.459 C30_U2.2@141.859,89.56 C29_U2.2@144.12,89.56 ; V1_U2.2@142.9,95.529 142.951,95.58 v3(142.951,98.781) 144.424,98.781 144.501,98.857
  Top Layer w2.032: v3(207.162,26.187) 207.67,25.679 209.753,25.679 211.912,23.52 211.912,11.379 213.436,9.855 R40_U2.2@223.088,9.855
  Bottom Layer w1.27: v3(141.961,87.655) 143.637,87.655 143.739,87.554 ; v3(142.951,98.781) 142.875,98.704 142.875,94.259 143.739,93.396 143.739,87.554 ; v3(207.162,26.187) 205.511,27.838 200.203,27.838 199.441,28.6 191.592,28.6 189.408,28.6 180.772,37.236 156.337,37.236 154.813,38.76 144.755,38.76 143.739,39.776 143.739,87.554
ISO_+15V_U1: C5_U1.1 C6_U1.1 C7_U1.2 C8_U1.2 C9_U1.2 C10_U1.2 C11_U1.2 C24_U1.1 C25_U1.2 C41_U1.1 C42_U1.1 C43_U1.1 C44_U1.1 C49_U1.1 C50_U1.1 C51_U1.1 C52_U1.1 C66_U1.1 C67_U1.1 C68_U1.1 C103_U1.1 D1_U1.1 D6_U1.1 D8_U1.2 D11_U1.1 D16_U1.1 L2_U1.2 P2_U1.1 P4_U1.1 P4_U1.16 R17_U1.1 U3_U1.2 U6_U1.11 U9_U1.11 U11_U1.11 | length 276.9
  Top Layer w1.016: P4_U1.1@44.374,128.047 44.374,129 P4_U1.16@45.326,129.952 ; C103_U1.1@53.873,96.291 U11_U1.11@57.549,96.291 ; C52_U1.1@53.95,65.049 54.229,65.329 54.966,65.329 ; C43_U1.1@54.305,37.211 54.61,37.516 U6_U1.11@57.752,37.516 ; 54.305,44.145 C41_U1.1@54.432,44.272 ; C66_U1.1@54.966,103.48 59.309,103.48 D16_U1.1@60.122,102.667 ; 54.991,65.354 54.966,65.329 ; C49_U1.1@54.991,72.288 59.741,72.288 D11_U1.1@60.655,71.374 ; U9_U1.11@57.651,65.329 54.966,65.329
  Top Layer w1.27: C24_U1.1@2.667,100.457 C24_U1.1@2.718,100.508 ; P2_U1.1@3.835,117.602 2.667,117.602 1.27,116.205 1.27,101.575 2.337,100.508 C24_U1.1@2.718,100.508 ; U3_U1.2@10.135,100.508 C24_U1.1@2.718,100.508
  Top Layer w1.524: P2_U1.1@3.835,117.602 3.886,117.551 C5_U1.1@11.125,117.551 ; C5_U1.1@11.176,117.602 C5_U1.1@11.125,117.551 ; D1_U1.1@19.025,117.551 C5_U1.1@11.125,117.551 ; 44.374,113.259 44.374,129 ; 44.374,129.005 P4_U1.16@45.324,129.954 ; 46.558,74.93 46.838,74.651 53.696,74.651 54.28,74.066 54.28,65.38 C52_U1.1@54.229,65.329 ; D8_U1.2@50.876,111.151 45.034,111.151 44.374,111.811 44.374,114.173 44.247,114.3 C11_U1.2@18.974,114.3 11.43,114.3 C6_U1.1@11.1,114.63 11.1,117.526 C5_U1.1@11.125,117.551 ; C103_U1.1@53.873,96.52 53.848,96.545 C68_U1.1@53.848,98.679 53.848,103.505 53.924,103.581 53.924,105.131 53.416,105.639 46.838,105.639 v3(46.558,105.359) 46.558,82.067 ; C43_U1.1@54.305,37.211 54.305,44.145 ; L2_U1.2@55.46,82.118 46.609,82.118 46.558,82.067 ; D6_U1.1@60.808,43.561 54.889,43.561 54.305,44.145 ; 46.558,82.067 46.558,49.936 48.387,48.108 53.34,48.108 54.305,47.142 54.305,44.145
  Bottom Layer w1.524: P4_U1.1@44.374,128.047 44.374,127.127 46.558,124.943 v3@46.558,105.334
ISO_+15V_U2: C5_U2.1 C6_U2.1 C7_U2.2 C8_U2.2 C9_U2.2 C10_U2.2 C11_U2.2 C24_U2.1 C25_U2.2 C41_U2.1 C42_U2.1 C43_U2.1 C44_U2.1 C49_U2.1 C50_U2.1 C51_U2.1 C52_U2.1 C66_U2.1 C67_U2.1 C68_U2.1 C103_U2.1 D1_U2.1 D6_U2.1 D8_U2.2 D11_U2.1 D16_U2.1 L2_U2.2 P2_U2.1 P4_U2.1 P4_U2.16 R17_U2.1 U3_U2.2 U6_U2.11 U9_U2.11 U11_U2.11 | length 192
  Top Layer w1.016: D6_U2.1@241.427,42.012 C42_U2.1@247.752,42.012 ; D16_U2.1@241.706,98.958 246.939,98.958 246.964,98.933 ; C50_U2.1@242.164,66.904 241.656,67.412 D11_U2.1@241.656,70.561 241.656,74.981 243.078,76.403 U9_U2.11@244.432,76.403 247.98,76.403 248.006,76.378 ; U6_U2.11@244.355,47.904 247.523,47.904 C44_U2.1@248.26,48.641 C43_U2.1@248.26,46.482 248.26,42.52 C42_U2.1@247.752,42.012 ; U11_U2.11@244.432,104.902 247.675,104.902 C68_U2.1@247.929,105.156 C103_U2.1@247.929,102.972 247.929,100.762 ; C66_U2.1@246.964,97.841 246.964,98.933 ; C42_U2.1@247.218,41.478 C42_U2.1@247.752,42.012 ; C49_U2.1@247.828,72.923 247.828,71.552 248.031,71.349 257.353,71.349 257.835,70.866 ; C49_U2.1@247.98,73.101 C51_U2.1@247.98,75.794 ; C51_U2.1@248.107,75.54 C52_U2.1@248.107,77.749 ; 254.66,95.402 248.641,95.402 247.929,96.114 247.929,100.762 ; 246.964,98.933 246.964,99.797 247.929,100.762
  Top Layer w1.27: P4_U2.1@215.623,129.952 215.623,128.999 P4_U2.16@214.671,128.047 214.671,125.171 217.459,125.171 D8_U2.2@219.278,123.352 ; U3_U2.2@243.815,13.386 247.701,13.386 247.828,13.259
  Top Layer w1.524: R17_U2.1@246.507,13.157 246.609,13.259 247.828,13.259 257.505,13.259 258.857,14.611 258.857,29.23 257.912,30.175 ; C42_U2.1@247.218,41.478 247.218,39.827 247.955,39.091 255.803,39.091 257.302,37.592 ; 258.267,27.661 258.806,27.122
  Top Layer w2.032: 215.316,125.908 218.161,125.908 220.717,123.352 ; D8_U2.2@219.278,123.352 220.717,123.352 ; 225.323,123.352 220.717,123.352 ; 255.448,114.605 254.254,115.799 L2_U2.2@245.047,115.799 245.047,121.934 243.629,123.352 220.717,123.352 ; P2_U2.1@255.956,27.915 258.013,27.915 258.267,27.661
ISO_+15VD_U1: C72_U1.1 C73_U1.1 C106_U1.1 C107_U1.1 C108_U1.1 C109_U1.1 C110_U1.1 C111_U1.1 C112_U1.1 C113_U1.1 L2_U1.1 U6_U1.3 U9_U1.3 U11_U1.3 | length 117.8
  Top Layer w1.016: 64.491,92.507 64.516,92.481 U11_U1.3@68.199,92.481 ; v4@64.643,61.493 64.668,61.519 U9_U1.3@68.301,61.519 ; 64.745,33.401 65.049,33.706 U6_U1.3@68.402,33.706
  Top Layer w1.524: L2_U1.1@60.96,82.118 C112_U1.1@64.44,82.118 ; C111_U1.1@64.491,79.604 64.491,92.507 v4(64.491,93.726) ; v4@64.643,61.493 C106_U1.1@64.643,56.49 64.643,51.791 C109_U1.1@64.668,51.765 ; C113_U1.1@64.77,22.149 C110_U1.1@64.77,24.536 64.77,33.376
  Bottom Layer w1.524: v4(64.491,93.726) 64.465,93.701 64.465,75.413 64.465,25.959 64.643,25.781 64.668,25.806
  other v4: 64.618,26.543 64.643,61.443
ISO_+15VD_U2: C72_U2.1 C73_U2.1 C106_U2.1 C107_U2.1 C108_U2.1 C109_U2.1 C110_U2.1 C111_U2.1 C112_U2.1 C113_U2.1 L2_U2.1 U6_U2.3 U9_U2.3 U11_U2.3 | length 90.9
  Top Layer w0.762: U11_U2.3@233.782,108.712 v3@237.236,108.712
  Top Layer w1.016: U6_U2.3@233.705,51.714 236.195,51.714 236.245,51.765 ; U9_U2.3@233.782,80.213 237.261,80.213 v3@237.287,80.188
  Top Layer w1.524: 236.195,51.714 236.22,51.689 236.779,51.689 237.185,52.095 v3@237.185,65.913 ; C72_U2.1@236.703,118.466 237.185,118.466 237.261,118.389 C111_U2.1@237.261,115.799 ; C111_U2.1@236.982,115.799 C111_U2.1@237.261,115.799 ; v3(237.236,108.661) 237.236,108.636 237.261,108.661 C111_U2.1@237.261,115.799 ; v3@237.287,80.188 237.592,80.493 C113_U2.1@237.592,89.687 ; L2_U2.1@239.319,115.799 C111_U2.1@237.261,115.799
  Bottom Layer w1.524: 237.185,64.668 237.236,64.719 v3(237.236,108.661)
  other v3: 237.236,65.913 237.363,80.264